# Altium PCB IndAlarmIf1s.PcbDoc
Units mil, origin at the board's own origin, x right, y up, seen from the top; angles counter-clockwise.
Board outline 6000 x 4000 mil, 2 copper layers (Top Layer, Bottom Layer); 45 components, 60 nets, 234 pads, 71 vias.
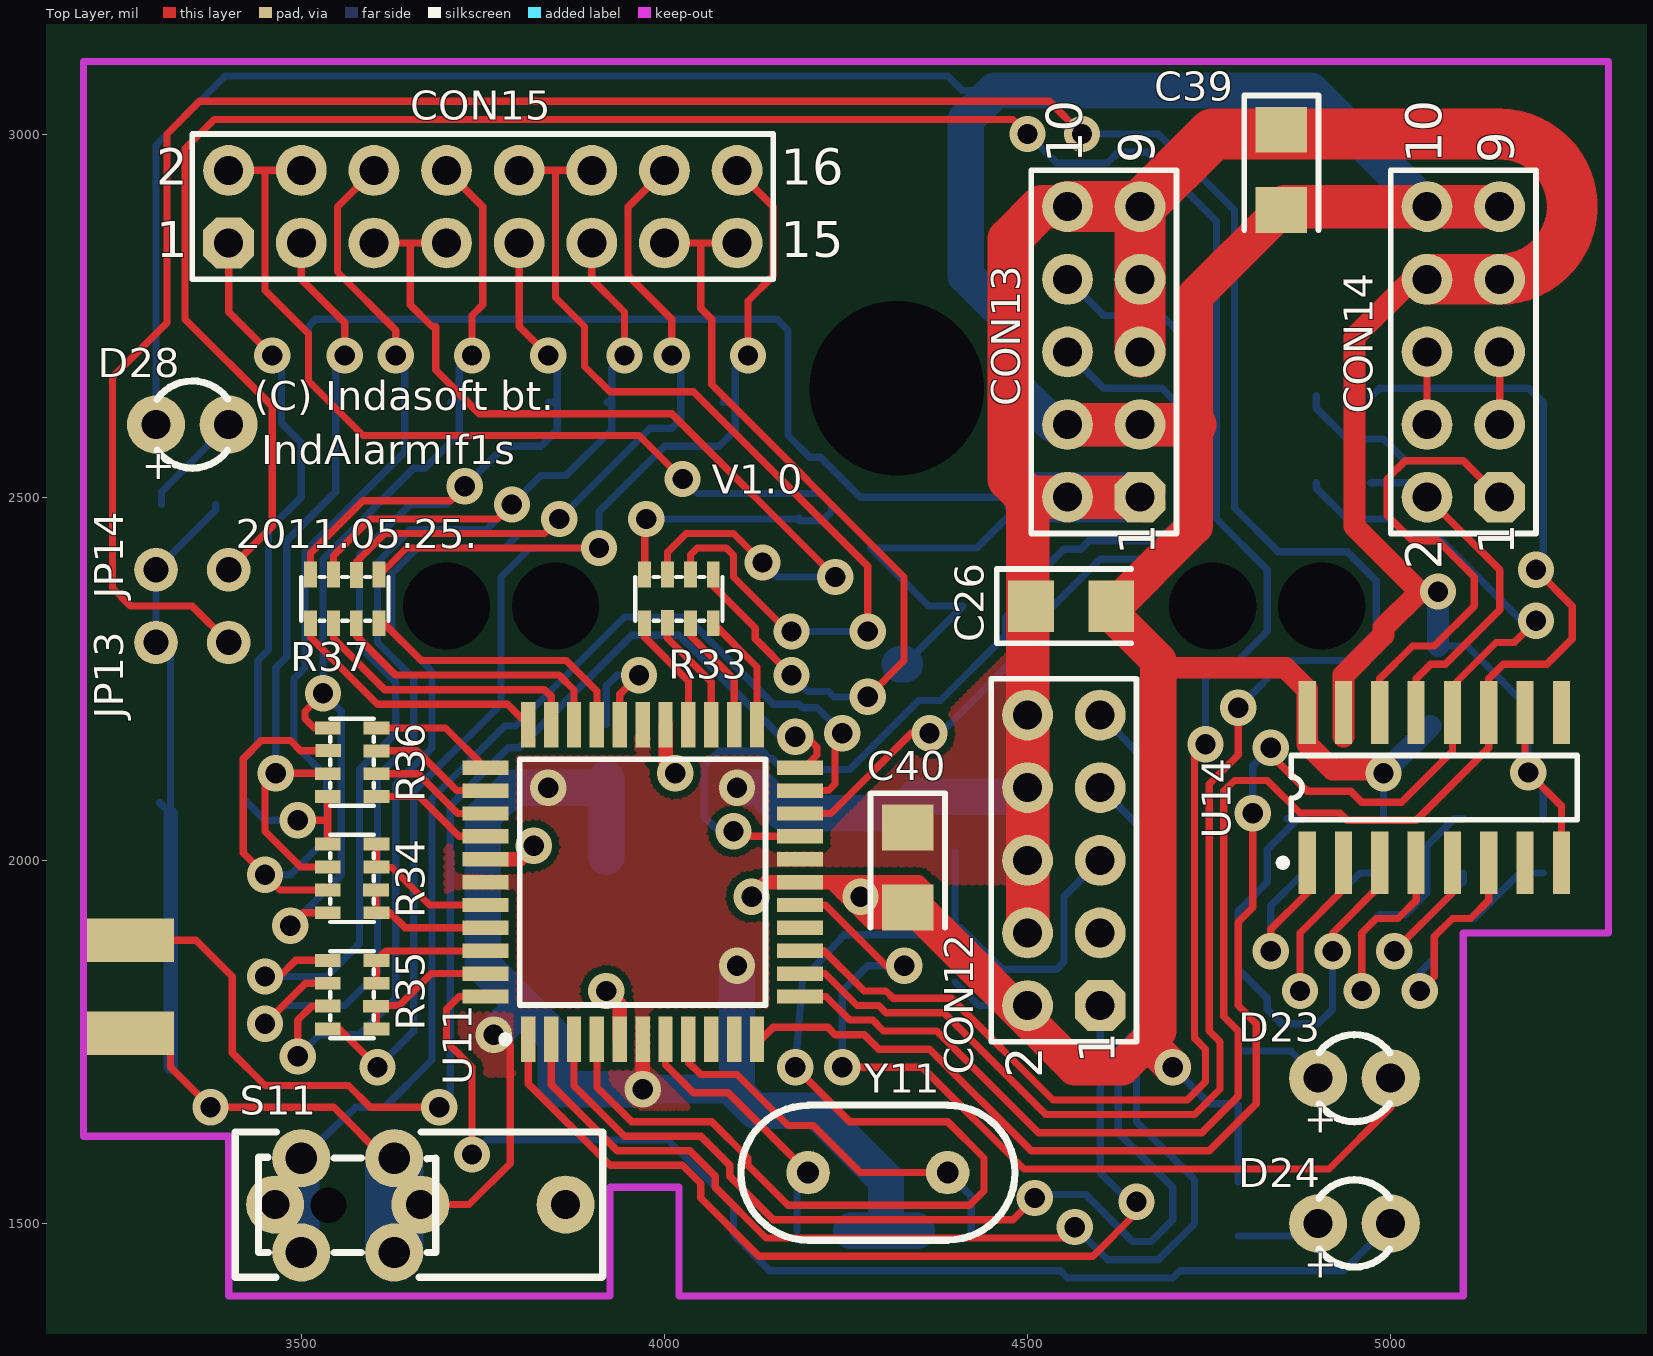
[diagram p0: Top Layer view]
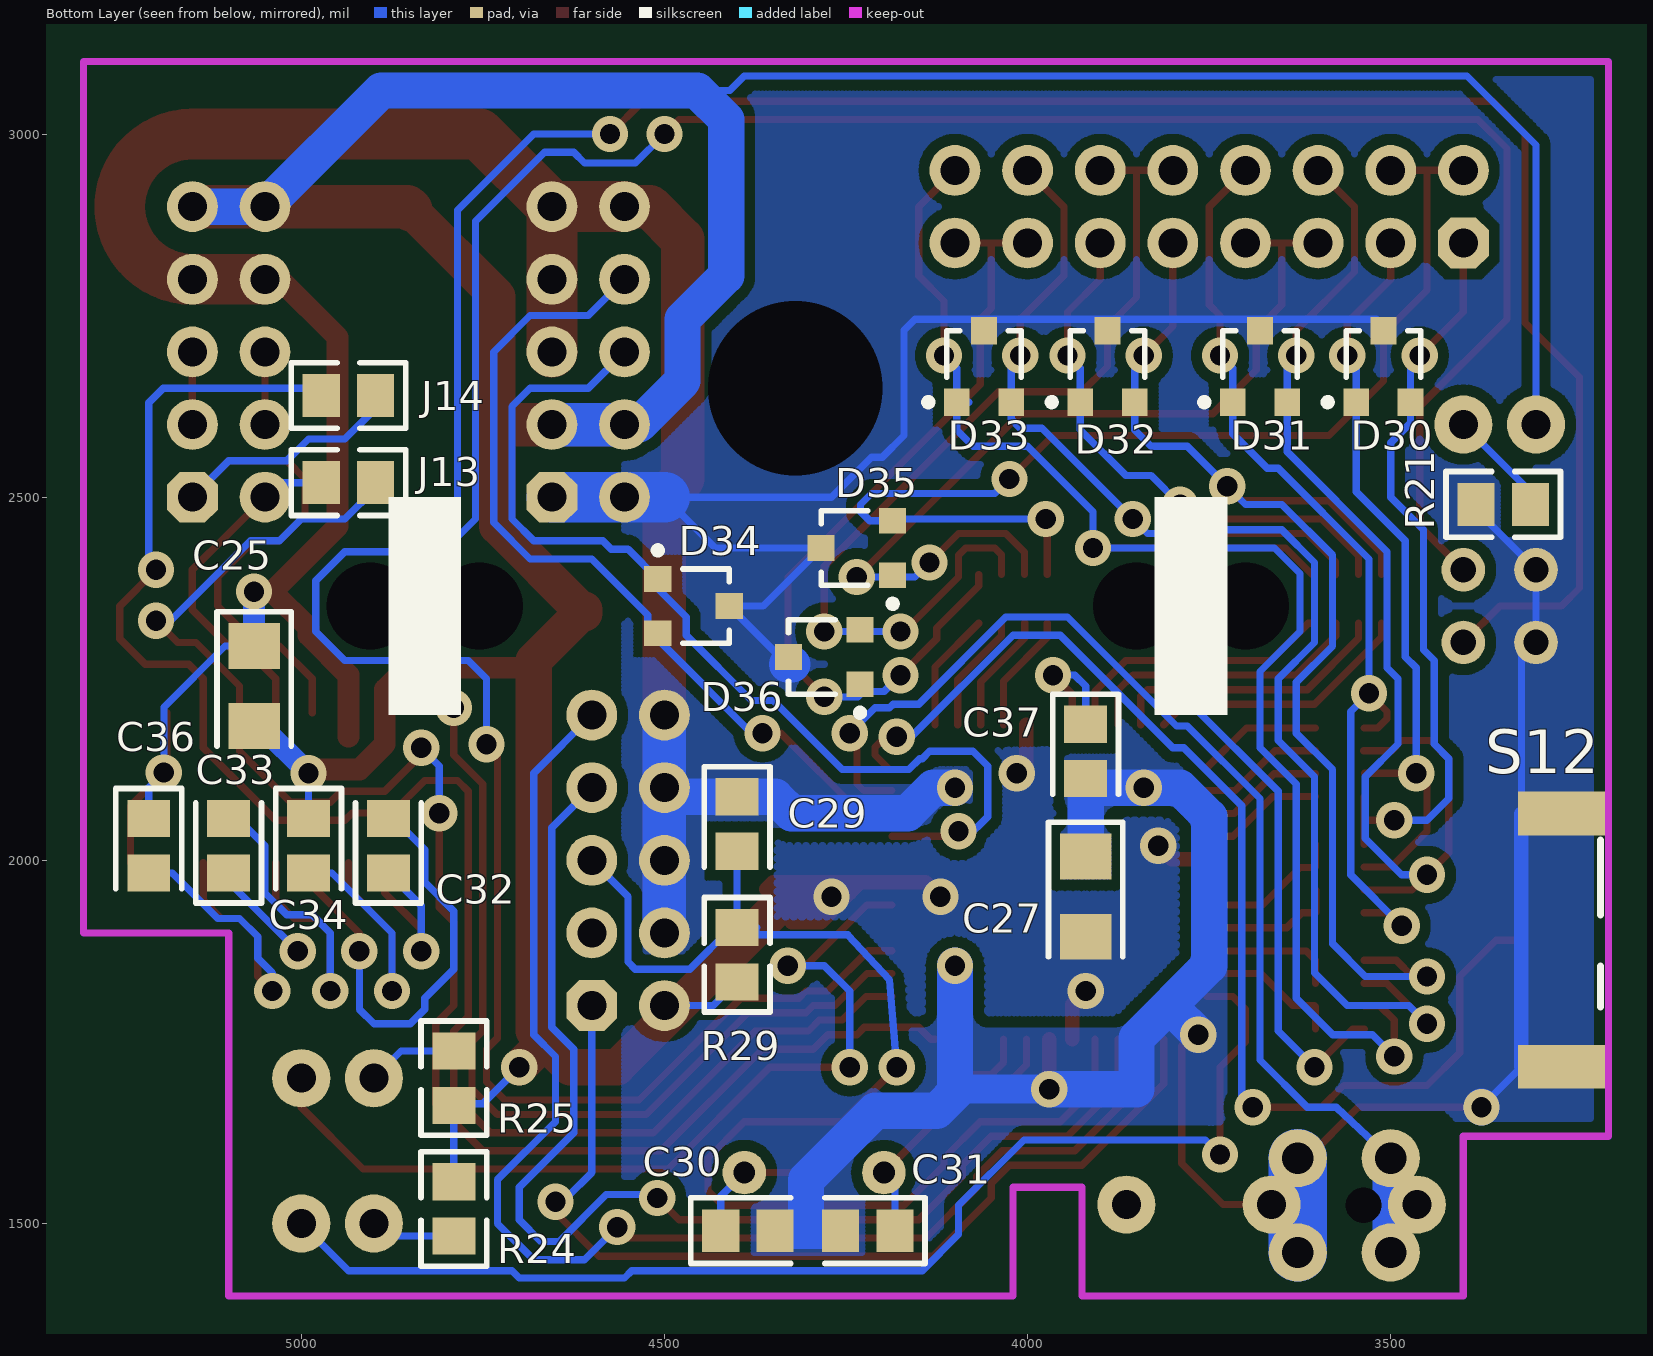
[diagram p1: Bottom Layer view, seen from below]

## Layer stack, top to bottom
Top Layer: signal copper 1.4
Dielectric: dielectric 12.6, FR-4, Dk 4.8
Bottom Layer: signal copper 1.4

## Board outline
1000,1000 7000,1000 7000,5000 1000,5000

## Design rules (kind name [scope] priority, off if disabled: settings)
Clearance Fill [All] p1 off: gap=15
Clearance [All] p2: gap=10
ComponentClearance [All] p1: gap=0 collisioncheckmode=1
PolygonConnect [All] p1: connectstyle=Direct reliefconductorwidth=10 reliefentries=4 polygonreliefangle="90 Angle"
RoutingLayers [All] p1: top layer=Horizontal bottom layer=Vertical
RoutingVias [All] p1: holewidth=28 width=50 viastyle="Through Hole" minholewidth=28 minwidth=50 maxholewidth=28 maxwidth=50
SolderMaskExpansion [All] p1: expansion=4
TestPointUsage [All] p1: valid=0 allowmultiple=FALSE
Testpoint [All] p1: side=15 testpointundercomponent=TRUE minsize=40 maxsize=100 preferedsize=60 minholesize=0 maxholesize=40 preferedholesize=32 testpointgrid=1 style=1023 order=-539222988
Width [All] p1: maxlimit=80 minlimit=10 preferedwidth=10
16 further rules are at their usual default settings.

## Components (designator, comment, footprint, x,y, rotation, side; value= is the part's Value field where it differs from the comment)
C25 "Cap Semi" CC3216-1206 5065,2240 r270 bottom
C26 "Cap Semi" CC3216-1206 4560,2350 r0 top
C27 "Cap Semi" CC3216-1206 3920,1950 r270 bottom
C29 "Cap Semi" CC2012-0805 4400,2050 r270 bottom
C30 "Cap Semi" CC2012-0805 4385,1490 r180 bottom
C31 "Cap Semi" CC2012-0805 4220,1490 r0 bottom
C32 "Cap Semi" CC2012-0805 4880,2020 r90 bottom
C33 "Cap Semi" CC2012-0805 5100,2020 r90 bottom
C34 "Cap Semi" CC2012-0805 4990,2020 r270 bottom
C36 "Cap Semi" CC2012-0805 5210,2020 r270 bottom
C37 "Cap Semi" CC2012-0805 3920,2150 r270 bottom
C39 "Cap Semi" CC3216-1206 4849.38,2950.62 r270 top
C40 "Cap Semi" CC3216-1206 4335,1990 r270 top
CON12 "ISP" HDR2X5 4600,1800 r90 top
CON13 "IIC" HDR2X5 4655,2500 r90 top
CON14 "RS232" HDR2X5 5150,2500 r90 top
CON15 "EXT" HDR2X8 3400,2850 r0 top
D23 "L-13ID" LED3MM 4900,1700 r0 top
D24 "L-13GD" LED3MM 4900,1500 r0 top
D28 "L-13YD" LED3MM 3300,2600 r0 top
D30 "ESDA6V1L" SO-G3/C2.5 3510,2680 r180 bottom
D31 "ESDA6V1L" SO-G3/C2.5 3680,2680 r180 bottom
D32 "ESDA6V1L" SO-G3/C2.5 3890,2680 r180 bottom
D33 "ESDA6V1L" SO-G3/C2.5 4060,2680 r180 bottom
D34 "ESDA6V1L" SO-G3/C2.5 4460,2350 r270 bottom
D35 "ESDA6V1L" SO-G3/C2.5 4235,2430 r90 bottom
D36 "ESDA6V1L" SO-G3/C2.5 4280,2280 r90 bottom
J13 "Res Semi" CR2012-0805 4935,2520 r180 bottom
J14 "Res Semi" CR2012-0805 4935,2640 r0 bottom
JP13 "Jumper" JP 3300,2300 r0 top
JP14 "Jumper" JP 3300,2400 r0 top
R21 "Res Semi" CR2012-0805 3345,2490 r180 bottom
R24 "Res Semi" CR2012-0805 4790,1520 r90 bottom
R25 "Res Semi" CR2012-0805 4790,1700 r270 bottom
R29 "Res Semi" CR2012-0805 4400,1870 r90 bottom
R33 "4x22" YC164 4020,2360 r180 top
R34 "4x270" YC164 3570,1975 r270 top
R35 "4x270" YC164 3570,1815 r270 top
R36 "4x470" YC164 3570,2135 r90 top
R37 "4x470" YC164 3560,2360 r0 top
S11 "SW-PB" SPPB512300+MINICW 3500,1460 r0 top
S12 "SW-PB" SPPB6A0400-R 3265,1890 r0 bottom
U11 "AtMega..4" 44A 3970,1970 r90 top
U14 "DS232AR-N" SOIC16N 5060,2100 r0 top
Y11 "XTAL" HC49 4390,1570 r180 top

## Footprints (in the part's own frame and the unit in brackets; to place one, negate y for a bottom-side part, rotate by r counter-clockwise, add the part's x,y. Pads: shape width x height; smd on the part's side, far side on the other; paste and mask are expansions set on the pad)
44A [mm] "QFP; 44 Leads; Body 10 x 10 mm; Pitch 0.8 mm"
  rect 1.6x0.5 smd: 1(-5.5,4) 2(-5.5,3.2) 3(-5.5,2.4) 4(-5.5,1.6) 5(-5.5,0.8) 6(-5.5,0) 7(-5.5,-0.8) 8(-5.5,-1.6) 9(-5.5,-2.4) 10(-5.5,-3.2) 11(-5.5,-4) 23(5.5,-4) 24(5.5,-3.2) 25(5.5,-2.4) 26(5.5,-1.6) 27(5.5,-0.8) 28(5.5,0) 29(5.5,0.8) 30(5.5,1.6) 31(5.5,2.4) 32(5.5,3.2) 33(5.5,4)
  rect 0.5x1.6 smd: 12(-4,-5.5) 13(-3.2,-5.5) 14(-2.4,-5.5) 15(-1.6,-5.5) 16(-0.8,-5.5) 17(0,-5.5) 18(0.8,-5.5) 19(1.6,-5.5) 20(2.4,-5.5) 21(3.2,-5.5) 22(4,-5.5) 34(4,5.5) 35(3.2,5.5) 36(2.4,5.5) 37(1.6,5.5) 38(0.8,5.5) 39(0,5.5) 40(-0.8,5.5) 41(-1.6,5.5) 42(-2.4,5.5) 43(-3.2,5.5) 44(-4,5.5)
  silkscreen extent -5.62,-4.3 4.3,4.92
CC2012-0805 [mm]
  rect 1.3x1.5 smd: 1(-0.95,0) 2(0.95,0)
  silkscreen extent -2,-1.15 1.5,1.15
CC3216-1206 [mm]
  rect 1.6x1.8 smd: 1(-1.4,0) 2(1.4,0)
  silkscreen extent -2.6,-1.3 2.1,1.3
CR2012-0805 [mm]
  rect 1.3x1.5 smd: 1(-0.95,0) 2(0.95,0)
  silkscreen extent -2,-1.15 2,1.15
HC49 [mil]
  round 60 hole 30: 1(0,0) 2(192.13,0)
  silkscreen extent -93,-93 285,93
HDR2X5 [mil] "Connector; Header; 5x2 Position"
  oct 70x70 hole 40: 1(0,0)
  round 70 hole 40: 2(0,100) 3(100,0) 4(100,100) 5(200,0) 6(200,100) 7(300,0) 8(300,100) 9(400,0) 10(400,100)
  silkscreen extent -50,-50 450,150
HDR2X8 [mil] "Connector; Header; 8x2 Position"
  oct 70x70 hole 40: 1(0,0)
  round 70 hole 40: 2(0,100) 3(100,0) 4(100,100) 5(200,0) 6(200,100) 7(300,0) 8(300,100) 9(400,0) 10(400,100) 11(500,0) 12(500,100) 13(600,0) 14(600,100) 15(700,0) 16(700,100)
  silkscreen extent -50,-50 750,150
JP [mil]
  round 60 hole 35: 1(0,0) 2(100,0)
LED3MM [mil]
  round 80 hole 40: 1(0,0) 2(100,0)
  silkscreen extent 1,-60 99,60
SO-G3/C2.5 [mm]
  rect 0.9x0.95 smd: 1(-0.95,-1.25) 2(0.95,-1.25) 3(0,1.25)
  silkscreen extent -2.08,-1.37 1.3,1.25
SOIC16N [mm] "Small Outline; 16 Leads; Body Width 3.9 mm; Pitch 1.27 mm"
  rect 0.6x2.2 smd: 1(-4.445,-2.625) 2(-3.175,-2.625) 3(-1.905,-2.625) 4(-0.635,-2.625) 5(0.635,-2.625) 6(1.905,-2.625) 7(3.175,-2.625) 8(4.445,-2.625) 9(4.445,2.625) 10(3.175,2.625) 11(1.905,2.625) 12(0.635,2.625) 13(-0.635,2.625) 14(-1.905,2.625) 15(-3.175,2.625) 16(-4.445,2.625)
  silkscreen extent -5.42,-2.75 5,1.13
SPPB6A0400-R [mil] "SPPB6A0400 SWITCH A NYÁK ÉLÉN"
  rect 120x60 smd far side: 1(0,0) 2(0,127.95)
  rect 120x60 smd: 3(0,-174.41) 3(0,174.41)
  silkscreen extent -54,-138 -54,92
SPPB512300+MINICW [mil]
  round 0 hole 49.21: 0(37.4,64.96)
  round 80 hole 40: 1(-36,66) 2(164,66) 3(364,66)
  round 80 hole 43.31: 1(0,0) 1(0,129.92) 2(127.95,0) 2(127.95,129.92)
  silkscreen extent -91,-34 415,166
YC164 [mm] "YC164 Chip Resistor array"
  rect 0.45x0.9 smd: 1(-1.2,-0.85) 2(-0.4,-0.85) 3(0.4,-0.85) 4(1.2,-0.85) 5(1.2,0.85) 6(0.406,0.838) 7(-0.4,0.85) 8(-1.2,0.85)
  silkscreen extent -1.52,-0.76 1.52,0.76

## Part data
C25 C26 C27 C29 C30 C31 C32 C33 C34 C36 C37 C39 C40: "Capacitor (Semiconductor SIM Model)"
CON12: library part "HEADER 5X2"
CON13 CON14: library part "Header 5X2", "Header, 5-Pin, Dual row"
CON15: library part "Header 8X2", "Header, 8-Pin, Dual row"
D23 D24 D28: library part LED3, "Typical BLUE SiC LED"
D30 D31 D32 D33 D34 D35 D36: "DUAL TRANSIL ARRAY / FOR ESD PROTECTION"
J13 J14 R21 R24 R25 R29: "Semiconductor Resistor"
JP13 JP14: "Jumper Wire"
R33 R34 R35 R36 R37: library part RES4
S11 S12: "Switch"
U11: library part ATMEGA164PA-AU
U14: "Dual RS-232 Transmitter/Receiver"
Y11: "Crystal Oscillator"

## Free pads (board coordinates)
  round 0 hole 240: 1(4320,2650)
  round 0 hole 120: 2(3700,2350) 2(3850,2350) 2(4755,2350) 2(4905,2350)

## Via types
v1: diameter 50, hole 28, Top Layer to Bottom Layer, 71 vias

## Nets (pads, with @x,y where several pads share a name; then routed paths per layer and width w, separated by ;. In a path a pad name is that pad's centre, name@x,y a point inside that pad or via, vN(x,y) a via of type N, cw(c..) or ccw(c..) an arc to the next point about the centre after c; other vN are vias at no path point)
AN8: CON15.1 D30.2 R34.1 R36.8 | length 1034
  Top Layer w10: CON15.1 3400,2755 v1(3460,2695) ; v1(3495,2055) 3536.54,2055 ; R34.1 R36.8
  Bottom Layer w10: v1(3460,2695) 3472.6,2682.4 D30.2 3472.6,2602.4 3500,2575 3500,2500 3455,2455 3455,2290 3440,2275 3440,2160 3420,2140 3420,2085 3450,2055 v1(3495,2055)
AN9: CON15.3 D30.1 R34.2 R36.7 | length 1058.1
  Top Layer w10: CON15.3 3500,2800 3560,2740 v1(3560,2695) ; R36.7@3535.79,2120 v1(3465,2120) 3450,2105 3450,2040 3499.25,1990.75 R34.2
  Bottom Layer w10: v1(3465,2120) 3465,2265 3480,2280 3480,2440 3547.4,2507.4 3547.4,2602.4 D30.1 3547.4,2682.4 v1(3560,2695)
ANA: CON15.6 D31.2 R34.3 R36.6 | length 1587.3
  Top Layer w10: R34.3 3470.75,1959.25 v1(3450,1980) 3420,2010 3420,2140 3445,2165 3485,2165 3499,2151 R36.6 ; CON15.6 3550,2900 3550,2810 3630,2730 v1(3630,2695) v1@3630,2715
  Bottom Layer w10: v1(3450,1980) 3485,1980 3535,2030 3535,2115 3490,2160 3490,2250 3505,2265 3505,2425 3642.6,2562.6 3642.6,2602.6 D31.2 3642.6,2682.4 v1(3630,2695)
ANB: CON15.8 D31.1 R34.4 R36.5 | length 1372.7
  Top Layer w10: v1(3485,1910) 3502.76,1927.76 R34.4 ; v1(3530,2230) 3505,2205 3505,2195 3517.76,2182.24 R36.5 ; CON15.8 3750,2900 3750,2765 3735,2750 v1(3735,2695) v1@3735,2715
  Bottom Layer w10: v1(3485,1910) 3555,1980 3555,2205 v1(3530,2230) 3530,2415 3655,2540 3670,2540 3717.4,2587.4 D31.1 ; D31.1@3705.79,2630.79 D31.1 ; v1(3735,2695) 3717.4,2677.4 D31.1
ANC: CON15.9 D32.2 R35.1 R37.8 | length 1735.6
  Top Layer w10: v1(3450,1840) 3470,1840 3492.24,1862.24 R35.1 ; R37.8 3512.76,2422.76 3585,2495 3705,2495 v1(3725,2515) ; CON15.9 3800,2735 v1(3840,2695)
  Bottom Layer w10: v1(3450,1840) 3535,1840 3580,1885 3580,2125 3630,2175 3630,2245 3580,2295 3580,2420 3650,2490 3700,2490 v1(3725,2515) 3780,2570 3830,2570 3852.6,2592.6 D32.2 ; v1(3840,2695) 3852.6,2682.4 D32.2 ; D32.2@3840.79,2630.79 D32.2
AND: CON15.11 D32.1 R35.2 R37.7 | length 1899
  Top Layer w10: v1(3450,1775) 3505.75,1830.75 R35.2 ; R37.7 3544.25,2419.25 3595,2470 3770,2470 v1(3790,2490) ; CON15.11 3900,2800 3945,2755 v1(3945,2695)
  Bottom Layer w10: v1(3450,1775) 3475,1800 3560,1800 3605,1845 3605,2115 3655,2165 3655,2250 3605,2300 3605,2410 3650,2455 3755,2455 v1(3790,2490) ; v1@3790,2500 v1(3790,2490) ; D32.1@3920.79,2630.79 D32.1 ; v1(3945,2695) 3927.4,2677.4 D32.1 ; v1(3790,2490) 3830,2530 3865,2530 3927.4,2592.4 D32.1
ANE: CON15.14 D33.2 R35.3 R37.6 | length 2096.4
  Top Layer w10: v1(3495,1730) 3495,1780 3514.25,1799.25 R35.3 ; R37.6 3576,2411 3615,2450 3835,2450 v1(3855,2470) ; CON15.14 3950,2900 3950,2805 4010,2745 v1(4010,2695)
  Bottom Layer w10: v1(3495,1730) 3525,1760 3580,1760 3630,1810 3630,2105 3680,2155 3680,2260 3625,2315 3625,2395 3660,2430 3780,2430 3800,2450 3835,2450 v1(3855,2470) 3980,2595 4010,2595 4022.6,2607.6 D33.2 4022.6,2682.4 v1(4010,2695)
ANF: CON15.16 D33.1 R35.4 R37.5 | length 2028.2
  Top Layer w10: R35.4@3542.24,1767.76 R35.4 3552.24,1767.76 v1(3605,1715) ; R37.5 3608.47,2393.47 3645,2430 v1(3910,2430) ; CON15.16 4150,2900 4150,2805 4115,2770 v1(4115,2695) v1@4115,2700
  Bottom Layer w10: v1(3605,1715) 3655,1765 3655,2095 3775,2215 3775,2390 3815,2430 v1(3910,2430) 3910,2480 4000,2570 4075,2570 4097.4,2592.4 D33.1 ; D33.1@4080.79,2630.79 D33.1 ; D33.1@4085.79,2630.79 D33.1 ; v1(4115,2695) 4097.4,2677.4 D33.1
GND: C25.1 C26.1 C27.1 C29.1 C30.2 C31.2 C36.1 C37.2 C39.1 C40.1 CON12.4 CON12.6 CON12.8 CON12.10 CON13.1 CON13.2 CON13.5 CON13.7 CON13.9 CON13.10 CON14.7 CON14.8 D30.3 D31.3 D32.3 D33.3 D34.3 D35.3 D36.3 JP13.1 JP14.1 pad.1 R21.1 S11.2 S12.2 S12.3 U11.6 U11.18 U11.28 U11.39 U14.8 U14.10 U14.15 | length 10058.5
  Top Layer w10: 3320,1715 v1(3375,1660) 3545,1660 S11.2@3615.08,1589.92 ; 3320,1715.59 S12.2@3320,1762.05 ; S11.2@3639,1526 3731,1526 3787.68,1582.68 3787.68,1744.73 3772.4,1760 v1(3765,1760) ; U14.10 5185,2125.12 v1(5189.16,2120.95) 5235,2075.12 U14.8
  Top Layer w20: v1(3970,1685) U11.6
  Top Layer w30: CON12.8@4485,2075 4490,2080 4490,2095 CON12.8@4495,2100 ; 4494.88,2045.12 4500,2040 CON12.6@4500,2015 ; U14.15@4935,2170 4935,2255 4990,2310 4990,2320 v1@5040,2370 ; CON14.8 5030,2800 4950,2720 4950,2460 v1@5040,2370 ; v1(5065,2370) v1@5040,2370
  Top Layer w60: CON12.4 4500,2500 ; CON13.10 4520,2900 4475,2855 4475,2525 4500,2500 ; CON13.1 4500,2500
  Top Layer w70: CON13.10 CON13.9 ; CON13.5 CON13.9 ; CON14.8 CON14.7 ccw(c5150,2900) 5150,3000 4755,3000 CON13.9
  Bottom Layer w10: S12.3@3305,2079.41 3320,2064.41 3320,2280 JP13.1 JP14.1 3382.4,2482.4 R21.1 ; S12.3@3320,1715.59 v1@3375,1660.59 ; D30.3 3510,2735 3520,2745 4155,2745 4170,2730 4170,2585 4200,2555 4215,2555 4270,2500 CON13.2 ; D36.3@4330.79,2270 D34.3 4364.21,2350 D35.3 4430,2430 4500,2500 ; C25.1 5065.12,2295 5105,2295 5189.16,2210.84 v1(5189.16,2120.95) 5210,2100.12 C36.1
  Bottom Layer w20: S12.3@3320,1715.59 S12.3@3320,2064.41
  Bottom Layer w30: C25.1 v1(5065,2370)
  Bottom Layer w40: v1(3970,1685) 4100,1685
  Bottom Layer w50: v1(3375,1660) v1@3375,1660.59 ; v1(3765,1760) 3800,1795 ; C27.1 C37.2 ; C37.2@3920,2100 v1(3840,2100) 3790,2100 3750,2060 3750,1855 3850,1755 3850,1685 v1(3970,1685) ; 4095,1685 4125,1655 4210,1655 4305,1560 4305,1490 ; 4100,1685 v1(4100,1855) ; v1(4100,2100) 4130,2100 4165,2065 4325,2065 4347.4,2087.4 C29.1 CON12.8@4497.6,2087.4 ; C31.2 C30.2 ; D36.3@4324.21,2270 D36.3@4330.79,2270
  Bottom Layer w60: CON12.4 CON12.10
  Bottom Layer w70: 4500,2500 CON13.1
  Bottom Layer w80: S11.2@3627.95,1460 S11.2@3627.95,1589.92
JP13: JP13.2 U11.13 | length 4568.9
  Top Layer w10: JP13.2 3350,2350 3265,2350 3240,2375 3240,2665 3315,2740 3315,3000 3360,3045 4530,3045 v1(4575,3000) ; U11.13 4220.98,1844.02 4265,1800 4295,1800 4305,1790 4385,1790 4525,1650 4730,1650 4765,1685 4765,1750 4750,1765 4750,2105 4790,2145 v1(4790,2210)
  Bottom Layer w10: v1(4575,3000) 4680,3000 4785,2895 4785,2485 4845,2425 4940,2425 4980,2385 4980,2315 4940,2275 4855,2275 v1(4790,2210)
JP14: JP14.2 U11.14 | length 4088.8
  Top Layer w10: JP14.2 3460,2460 3460,2625 3340,2745 3340,2980 3380,3020 4480,3020 v1(4500,3000) ; U11.14 4219.49,1875.51 4275,1820 4305,1820 4315,1810 4395,1810 4535,1670 4720,1670 4745,1695 4745,1740 4730,1755 4730,2145 v1(4745,2160)
  Bottom Layer w10: v1(4500,3000) 4540,2960 4610,2960 4625,2975 4665,2975 4760,2880 4760,2470 4830,2400 4830,2315 4790,2275 4770,2275 4745,2250 v1(4745,2160)
JRD: CON14.2 J13.1 U14.13 | length 483.3
  Top Layer w10: U14.13 5035,2250 5055,2270 5075,2270 5150,2345 5150,2400 5100,2450 CON14.2
  Bottom Layer w10: J13.1 5030,2520 CON14.2
JTX: CON14.1 J14.1 U14.14 | length 970
  Top Layer w10: U14.14 4985,2250 5030,2295 5060,2295 5115,2350 5115,2390 5065,2440 5030,2440 4995,2475 4995,2525 5020,2550 5100,2550 CON14.1
  Bottom Layer w10: J14.1 4897.6,2622.4 4940,2580 4990,2580 5020,2550 5100,2550 CON14.1
L11: D23.2 U11.16 | length 1250.7
  Top Layer w10: U11.16 4221.5,1938.5 4305,1855 v1(4330,1855) ; v1@4265,1715 4355,1715 4495,1575 4875,1575 4915,1575 5000,1660 D23.2
  Bottom Layer w10: v1(4245,1715) 4245,1820 4280,1855 v1(4330,1855)
L12: D24.2 U11.44 | length 1681.7
  Top Layer w10: v1(3735,1595) 3735,1715 3700,1750 3700,1795 3717.52,1812.52 U11.44
  Bottom Layer w10: v1(3735,1595) 3755,1615 4005,1615 4095,1525 4095,1485 4145,1435 4545,1435 4555,1425 4700,1425 4710,1435 4935,1435 D24.2
MISO.: CON12.9 U11.2 | length 1861.8
  Top Layer w10: U11.2 3844.02,1690.98 3935,1600 4035,1600 4070,1565 4070,1550 4140,1480 v1@4550,1480 ; v1@4555,1485 v1(4565,1495)
  Bottom Layer w10: v1(4565,1495) 4610,1450 4680,1450 4730,1500 4730,1560 4650,1640 4650,1730 4680,1760 4680,2120 CON12.9
MOSI.: CON12.1 U11.1 | length 1327.9
  Top Layer w10: U11.1 3812.52,1692.48 3925,1580 4025,1580 4050,1555 4050,1535 4130,1455 4590,1455 4650,1515 v1(4650,1530)
  Bottom Layer w10: CON12.1 4600,1570 v1@4635,1535
NetC30_1: C30.1 U11.8 Y11.1 | length 544.8
  Top Layer w10: U11.8 4032.99,1722.01 4050,1705 4100,1705 4170,1635 4205,1635 4270,1570 Y11.1
  Bottom Layer w10: Y11.1 4422.4,1537.6 C30.1
NetC31_1: C31.1 U11.7 Y11.2 | length 379.2
  Top Layer w10: U11.7 4001.5,1718.5 4040,1680 4087.87,1680 Y11.2
  Bottom Layer w10: C31.1 4182.6,1554.72 Y11.2
NetC32_1: C32.1 U14.1 | length 268.6
  Top Layer w10: v1(4835,1875) 4835,1905 4885,1955 U14.1
  Bottom Layer w10: v1(4835,1875) 4835,1937.6 C32.1
NetC32_2: C32.2 U14.3 | length 678.4
  Top Layer w10: v1(4920,1875) 4920,1900 4985,1965 U14.3
  Bottom Layer w10: C32.2@4857.4,2057.4 C32.2 4872.4,2057.4 4830,2015 4830,1970 4790,1930 4790,1850 4830,1810 4830,1795 4850,1775 4900,1775 4920,1795 v1(4920,1875)
NetC33_1: C33.1 U14.5 | length 301.7
  Top Layer w10: v1(5005,1875) 5085,1955 U14.5
  Bottom Layer w10: v1(5005,1875) 5100,1970 C33.1
NetC33_2: C33.2 U14.4 | length 548.6
  Top Layer w10: v1(4960,1820) 4960,1900 4980,1920 5010,1920 5035,1945 U14.4
  Bottom Layer w10: v1(4960,1820) 4960,1900 4985,1925 5020,1925 5050,1955 5050,2020 5087.4,2057.4 C33.2
NetC34_2: C34.2 U14.2 | length 430.7
  Top Layer w10: v1(4875,1820) 4875,1900 4935,1960 U14.2
  Bottom Layer w10: v1(4875,1820) 4875,1900 4957.6,1982.6 C34.2
NetC36_2: C36.2 U14.6 | length 528.5
  Top Layer w10: U14.6 5135,1945 5110,1920 5085,1920 5060,1895 5060,1840 ; 5060,1840 v1(5040,1820) 5060,1840
  Bottom Layer w10: v1(5040,1820) 5040,1845 5060,1865 5060,1895 5085,1920 5115,1920 5177.6,1982.6 C36.2
NetC37_1: C37.1 U11.29 | length 183.3
  Top Layer w10: U11.29 3938.5,2228.5 v1(3965,2255)
  Bottom Layer w10: C37.1 3920,2240 3935,2255 v1(3965,2255)
NetCON14_3: CON14.3 CON14.5 | length 100
  Top Layer w10: CON14.3 CON14.5
NetCON14_4: CON14.4 CON14.6 | length 100
  Top Layer w10: CON14.4 CON14.6
NetD23_1: D23.1 R25.1 | length 130.5
  Bottom Layer w10: R25.1 4862.6,1737.4 D23.1 D23.1@4905,1700
NetD24_1: D24.1 R24.1 | length 117.2
  Bottom Layer w10: R24.1 4882.6,1482.6 D24.1
NetD28_2: D28.2 R21.2 | length 148.3
  Bottom Layer w10: R21.2 3307.6,2507.6 D28.2
NetR33_5: R33.5 U11.26 | length 164.9
  Top Layer w10: R33.5 3972.76,2307.24 4032.99,2247.01 4032.99,2227.01 U11.26
NetR33_6: R33.6 U11.25 | length 165.5
  Top Layer w10: R33.6 4004,2306 4064.49,2245.51 4064.49,2225.51 U11.25
NetR33_7: R33.7 U11.24 | length 165
  Top Layer w10: R33.7 4035.75,2309.25 4095.98,2249.02 4095.98,2224.02 U11.24
NetR33_8: R33.8 U11.23 | length 165
  Top Layer w10: R33.8 4127.48,2266.3 4127.48,2222.52 U11.23
NetR34_5: R34.5 R34.6 U11.41 | length 191.9
  Top Layer w10: R34.6 3603,1928.22 R34.5@3604.78,1930 ; R34.5 3622.24,1927.76 3642.99,1907.01 U11.41
NetR34_7: R34.7 R34.8 U11.40 | length 203.1
  Top Layer w10: R34.8 R34.7 3604.21,1990 3625,1990 3676.5,1938.5 U11.40
NetR35_5: R35.5 R35.6 U11.43 | length 232.5
  Top Layer w10: U11.43 3679.02,1844.02 3635,1800 R35.6@3604.93,1800 ; R35.6@3603.47,1798.54 R35.6@3604.93,1800 ; R35.6@3603.47,1798.54 R35.5 R35.6@3603.47,1798.54 ; R35.6@3603.47,1798.54 R35.6@3604.93,1800
NetR35_7: R35.7 R35.8 U11.42 | length 187
  Top Layer w10: R35.7 R35.8 3616.22,1875 3752.95,1875 U11.42
NetR36_1: R36.1 U11.37 | length 172.7
  Top Layer w10: R36.1 3662.24,2087.76 3717.01,2032.99 U11.37
NetR36_2: R36.2 U11.36 | length 172.7
  Top Layer w10: R36.2 3660.75,2119.25 3715.51,2064.49 U11.36
NetR36_3: R36.3 U11.35 | length 172.7
  Top Layer w10: R36.3 3659.25,2150.75 3714.02,2095.98 U11.35
NetR36_4: R36.4 U11.34 | length 172.7
  Top Layer w10: R36.4 3698.7,2182.24 U11.34
NetR37_1: R37.1 U11.33 | length 369.1
  Top Layer w10: R37.1 3512.76,2307.24 3605,2215 3784.05,2215 U11.33
NetR37_2: R37.2 U11.32 | length 393
  Top Layer w10: R37.2 3544.25,2305.75 3615,2235 3835,2235 3844.02,2225.98 U11.32
NetR37_3: R37.3 U11.31 | length 396
  Top Layer w10: R37.3 3575.75,2309.25 3630,2255 3855,2255 3875.51,2234.49 U11.31
NetR37_4: R37.4 U11.30 | length 385
  Top Layer w10: R37.4 3613.47,2326.53 3665,2275 3865,2275 3907.01,2232.99 U11.30
O89: CON15.2 CON15.4 D35.2 R33.4 | length 1552.9
  Top Layer w10: CON15.2 CON15.4 ; 3450,2950 3450,2785 3510,2725 3510,2660 3585,2585 3965,2585 v1(4025,2525) ; R33.4 3972.76,2467.76 v1(3975,2470)
  Bottom Layer w10: v1(3975,2470) 4183.19,2470 D35.2@4185,2471.81 ; v1(4025,2525) 4045,2505 4215,2505 4230,2490 4230,2480 4217.4,2467.4 D35.2
OAB: CON15.5 CON15.7 D35.1 R33.3 | length 1287.5
  Top Layer w10: CON15.5@3600,2820 CON15.5 CON15.7 ; 3650,2850 3650,2765 3680,2735 3685,2735 3685,2675 3745,2615 4010,2615 v1(4235,2390) ; R33.3 4004.25,2424.25 4030,2450 4095,2450 v1(4135,2410)
  Bottom Layer w10: v1(4135,2410) 4155,2390 v1(4235,2390)
OCD: CON15.10 CON15.12 D36.2 R33.2 | length 1341.1
  Top Layer w10: CON15.10 CON15.12 ; 3850,2950 3850,2775 3890,2735 3890,2680 3925,2645 4040,2645 4280,2405 v1(4280,2315) ; R33.2 4035.75,2420.75 4045,2430 4085,2430 4095,2420 4095,2390 4170,2315 v1(4175,2315) v1@4155,2315
  Bottom Layer w10: v1(4175,2315) v1(4280,2315)
OEF: CON15.13 CON15.15 D36.1 R33.1 | length 1162.2
  Top Layer w10: CON15.13 CON15.15 ; 4050,2850 4050,2760 4065,2745 4065,2655 4330,2390 4330,2275 v1(4280,2225) ; R33.1 4067.24,2377.76 4125,2320 4125,2305 v1(4175,2255)
  Bottom Layer w10: v1(4175,2255) 4197.4,2232.6 4225.79,2232.6 4233.39,2225 v1(4280,2225)
R\E\S\E\T\.: C29.2 CON12.5 R29.2 U11.4 | length 1880.7
  Top Layer w10: U11.4 3907.01,1687.99 3955,1640 4065,1640 4115,1590 4115,1580 4170,1525 4420,1525 4440,1545 4440,1590 4390,1640 4355,1640 4255,1640 v1(4180,1715)
  Bottom Layer w10: v1(4180,1715) 4190,1835 4247.4,1897.4 4370,1897.4 4380,1907.4 R29.2 ; R29.2@4372.4,1907.4 R29.2 ; C29.2 R29.2 ; R29.2@4407.4,1900 R29.2 ; CON12.5 4550,1950 4550,1860 4540,1850 4465,1850 4407.6,1907.4 R29.2
RXD12: J13.2 U11.11 U14.12 | length 2258.6
  Top Layer w10: U11.11 4133.46,1753.46 4150,1770 4225,1770 4235,1760 4275,1760 4295,1740 4365,1740 4505,1600 4750,1600 4815,1665 4815,1775 4790,1800 4790,1915 4810,1935 v1(4810,2065) ; v1@4825,2155 4885,2095 4945,2095 4960,2080 5015,2080 5085,2150 U14.12 5085,2240 5145,2300 5170,2300 v1(5200,2330)
  Bottom Layer w10: v1(4810,2065) 4810,2130 v1(4835,2155) ; J13.2 4897.6,2512.4 4940,2470 5000,2470 5030,2440 5070,2440 5180,2330 v1(5200,2330)
S11: S11.0 S11.1 U11.21 | length 1671.5
  Top Layer w10: U11.21 4225.98,2095.99 4235,2105 v1@4235,2175
  Bottom Layer w10: S11.1@3500,1589.92 3575,1660 3615.08,1660 3680,1724.92 3680,2085 3780,2185 3795,2185 3945,2335 4030,2335 4150,2215 4185,2215 4190,2210 4210,2210 v1(4245,2175)
  Bottom Layer w20: S11.1@3500,1460 S11.1@3500,1589.92 ; S11.1@3515,1480 S11.1@3515,1569.92
S12: S12.1 U11.22 | length 1617.6
  Top Layer w10: S12.1@3320,1890 3355,1890 3405,1840 3405,1735 3450,1690 3565,1690 3595,1660 v1(3690,1660) ; U11.22@4190,2125 4210,2145 4210,2155.64 v1@4195.64,2170
  Bottom Layer w10: v1(3690,1660) 3705,1675 3705,2075 3785,2155 3800,2155 3955,2310 4020,2310 v1@4160,2170
  other v1: 4180,2170
SCK.: CON12.7 U11.3 | length 1696.7
  Top Layer w10: U11.3 3875.51,1689.49 3945,1620 4050,1620 4090,1580 4090,1565 4150,1505 4480,1505 v1(4510,1535)
  Bottom Layer w10: v1@4500,1540 4580,1540 4645,1475 4670,1475 4700,1505 4700,1550 4625,1625 4625,1740 4655,1770 4655,2045 CON12.7
SCL.: CON13.6 D34.1 U11.19 | length 1394.6
  Top Layer w10: v1@4112.99,2032.99 U11.19
  Bottom Layer w10: v1@4110,2030 4085,2030 4055,2060 4055,2130 4075,2150 4135,2150 4135.28,2149.72 4145,2140 4148.54,2140 4163.54,2125 4255,2125 4350,2220 4380,2220 4470,2310 4470,2335 4509.21,2374.21 D34.1 ; D34.1@4507.4,2387.4 D34.1 ; D34.1@4509.21,2389.21 D34.1 ; CON13.6 4605,2650 4685,2650 4710,2625 4710,2470 4680,2440 4585,2440 4573.19,2428.19 4550,2428.19 D34.1
  other v1: 4095,2040
SDA.: CON13.8 D34.2 U11.20 | length 1184.1
  Top Layer w10: U11.20 4229.49,2064.49 4340,2175 v1(4365,2175)
  Bottom Layer w10: v1(4365,2175) 4380,2175 4509.21,2304.21 D34.2 ; D34.2@4509.21,2314.21 D34.2 ; CON13.8 4605,2750 4685,2750 4735,2700 4735,2465 4685,2415 4650,2415 4600,2415 4560,2375 4522.91,2337.91 4522.91,2326.3 D34.2
TXD12: J14.2 U11.12 U14.11 | length 2398.2
  Top Layer w10: U11.12 4222.48,1812.52 4255,1780 4286.72,1780 4301.72,1765 4375,1765 4515,1625 4740,1625 4790,1675 4790,1765 4770,1785 4770,2095 4785,2110 4830,2110 4875,2065 4930,2065 4940,2055 5035,2055 5135,2155 U14.11 5135,2250 5155,2270 5215,2270 5250,2305 5250,2350 v1(5200,2400)
  Bottom Layer w10: J14.2 4975,2640 4985,2650 5190,2650 5210,2630 5210,2410 v1(5200,2400)
VCC: C25.2 C26.2 C27.2 C34.1 C39.2 C40.2 CON12.2 CON13.3 CON13.4 CON14.9 CON14.10 D28.1 R24.2 R25.2 R29.1 U11.5 U11.17 U11.27 U11.38 U14.16 | length 6910.1
  Top Layer w10: C26.2@4610.12,2344.88 C26.2@4610.12,2350 ; U14.16 U14.16@4885,2235
  Top Layer w20: U11.38 3801.49,2001.49 v1(3820,2020) ; v1(3920,1820) 3938.5,1801.5 U11.5 ; U11.27 4001.49,2133.51 v1(4015,2120) ; v1(4120,1950) 4140,1970 U11.17 4230,1970 ; C40.2@4325,1915 4285,1915 4255,1945 4245,1955 4230,1970 ; C40.2@4360,1960 4350,1970 4230,1970
  Top Layer w30: 4690,2265 4855,2265 4885,2235 4885,2170 4885,2160 4920,2125 4985,2125 v1(4990,2120)
  Top Layer w50: v1(4270,1950) 4330,1950 4565,1715 4630,1715 4680,1765 4680,2275 C26.2@4610.12,2344.88 ; C26.2@4610,2340 4730,2460 4730,2535 4730,2776.12 C39.2 ; 4665,1750 v1(4700,1715) ; CON13.3@4665,2600 4730,2600
  Top Layer w60: CON13.4 4730,2600 ; C39.2 4853.88,2900 CON14.9
  Bottom Layer w10: D28.1 3300,2985 3395,3080 4390,3080 4410,3060 4460,3060 ; R29.1 4432.6,1800 CON12.2 ; v1(4700,1715) 4750,1665 4787.6,1665 R25.2 R24.2 ; C34.1 v1(4990,2120) ; C25.2@5054.88,2184.88 C25.2
  Bottom Layer w30: v1(4990,2120) C25.2@5054.88,2184.88
  Bottom Layer w50: CON13.4 4535,2600 4475,2660 4475,2745 4415,2805 4415,3020 4455,3060 4890,3060 CON14.10 CON14.9
  Bottom Layer w60: CON13.4 CON13.3
pads on no net: CON12.3 S11.3 U11.9 U11.10 U11.15 U14.7 U14.9

## Polygon pours and split planes (outlines as drawn)
GND on Top Layer (hatched 45Degree grid 8 track 10, remove dead copper): 3785,2155 3700,2155 3700,1705 3875.51,1705 3940.51,1640 4215,1640 4215,1970 4500,1970 4500,2310 4235,2045 4215,2045 4215,2175 3790,2175
VCC on Bottom Layer (hatched 45Degree grid 8 track 10, remove dead copper): 3785,2155 3785,1790 4155,1790 4262.4,1897.4 4345,1897.4 4345,2025 4250,2025 4125,2150 4120,2150
GND on Bottom Layer (hatched 45Degree grid 8 track 10, remove dead copper): 4525,2240 4525,1875 4480,1875 4305,2050 4075,2050 4075,2150 4280,2150 4315,2185 4356.62,2226.62 4365,2226.62 4373.38,2235 4525,2235
GND on Bottom Layer (hatched 90Degree grid 5 track 10, remove dead copper): 3210,3090 4420,3090 4420,2792.35 4555,2657.35 4555,1415 3810,1415 3810,1615 3710,1615 3665,1660 3425,1660 3395,1630 3205,1630

## Keep-outs
Keep-Out Layer:
  lines w10: 3200,1620 3200,3100 5300,3100 5300,1900 5100,1900 5100,1400 4500,1400 4400,1400 4020,1400 4020,1550 3925,1550 3925,1400 3400,1400 3400,1620 3200,1620

## Silkscreen, mask and mechanical layers (free items; w line width, h text height)
Top Overlay:
  text "(C) Indasoft bt." at 3434.88,2620 h40
  text "IndAlarmIf1s" at 3445,2545 h40
  text "V1.0" at 4065,2505 h40
  text "2011.05.25." at 3410,2430 h40
Bottom Overlay:
  rectangle: 3725,2200 3825,2500
  rectangle: 4780,2200 4880,2500

## Text inside footprints (layer, text, board x,y; h text height)
CON12: Top Overlay "2" at 4520,1700 h50 r90; Top Overlay "1" at 4620,1720 h50 r90
CON13: Top Overlay "1" at 4675,2420 h50 r90; Top Overlay "9" at 4675,2960 h50 r90; Top Overlay "10" at 4575,2960 h50 r90
CON14: Top Overlay "2" at 5070,2400 h50 r90; Top Overlay "1" at 5170,2420 h50 r90; Top Overlay "9" at 5170,2960 h50 r90; Top Overlay "10" at 5070,2960 h50 r90
CON15: Top Overlay "16" at 4160,2930 h50; Top Overlay "15" at 4160,2830 h50; Top Overlay "1" at 3300,2830 h50; Top Overlay "2" at 3300,2930 h50
D23: Top Overlay "+" at 4880,1625 h40
D24: Top Overlay "+" at 4880,1425 h40
D28: Top Overlay "+" at 3280,2525 h40